# Altium PCB PCB1.PcbDoc
Units mm, origin at the board's own origin, x right, y up, seen from the top; angles counter-clockwise.
Board outline 152.4 x 101.6 mm, 2 copper layers (Top Layer, Bottom Layer); 58 components, 44 nets, 218 pads, 0 vias.
Unrouted connection lines stored in the file: 33.
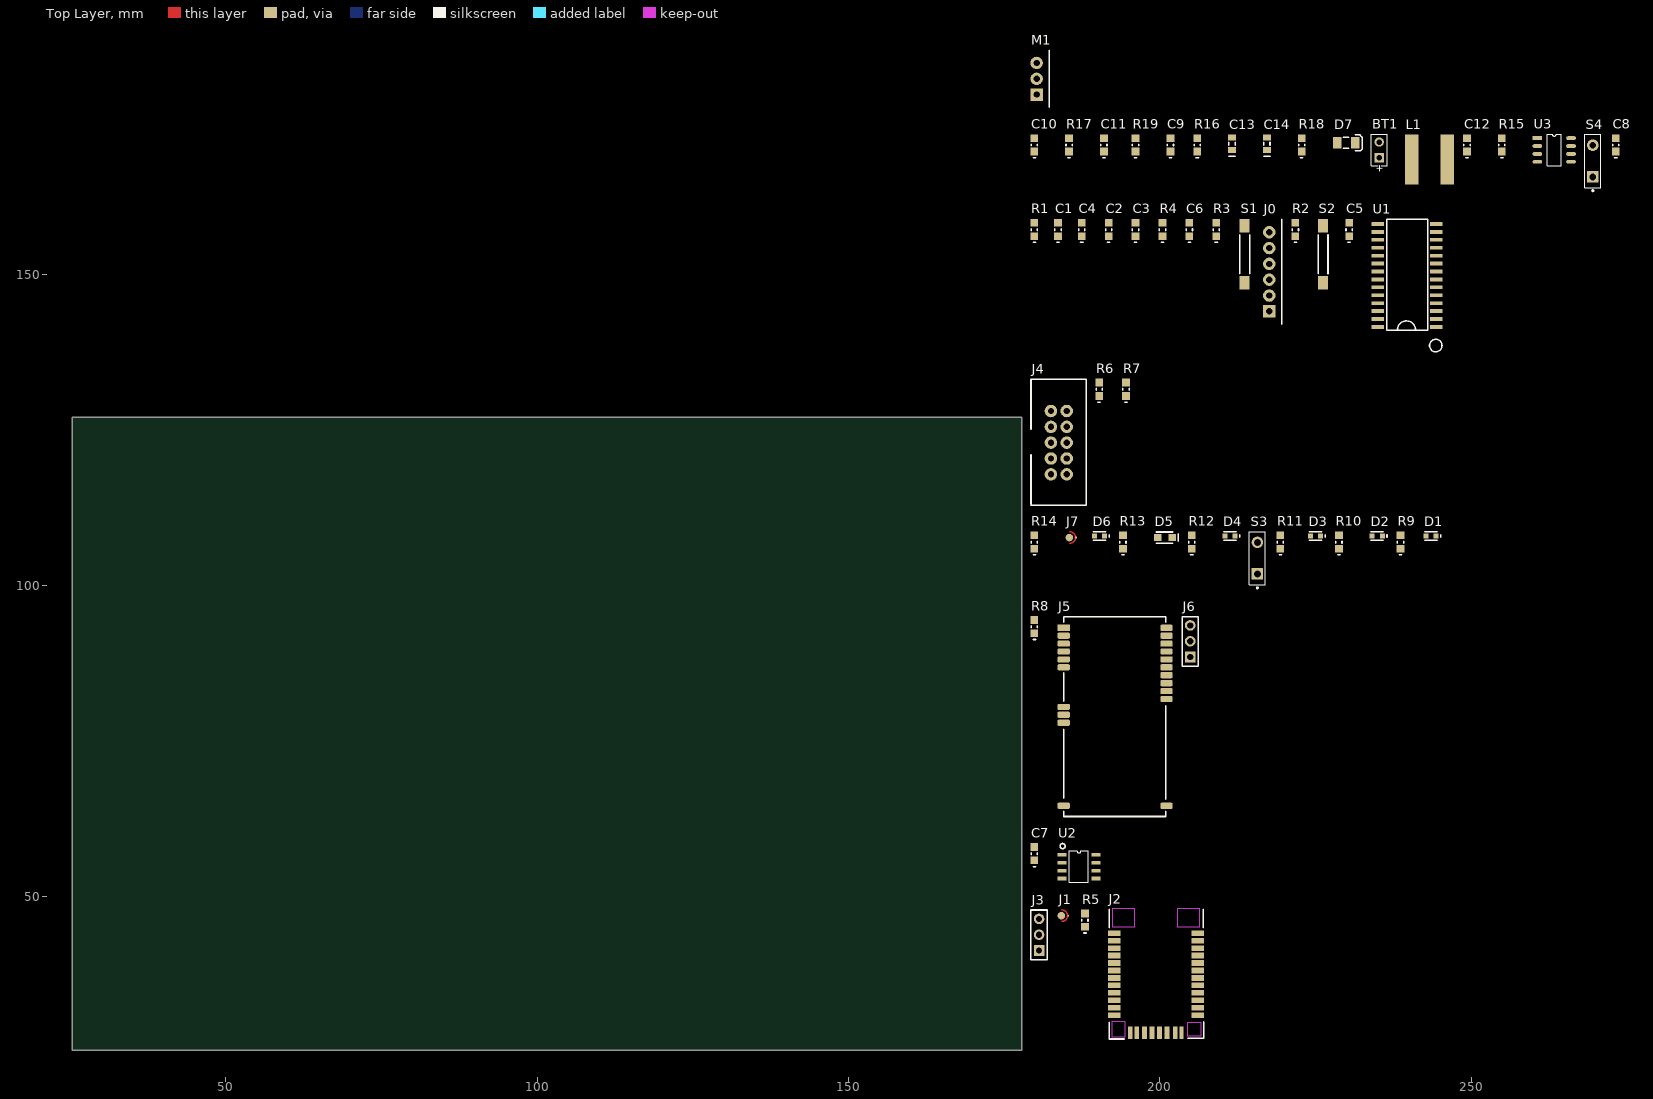
[diagram p0: Top Layer view]
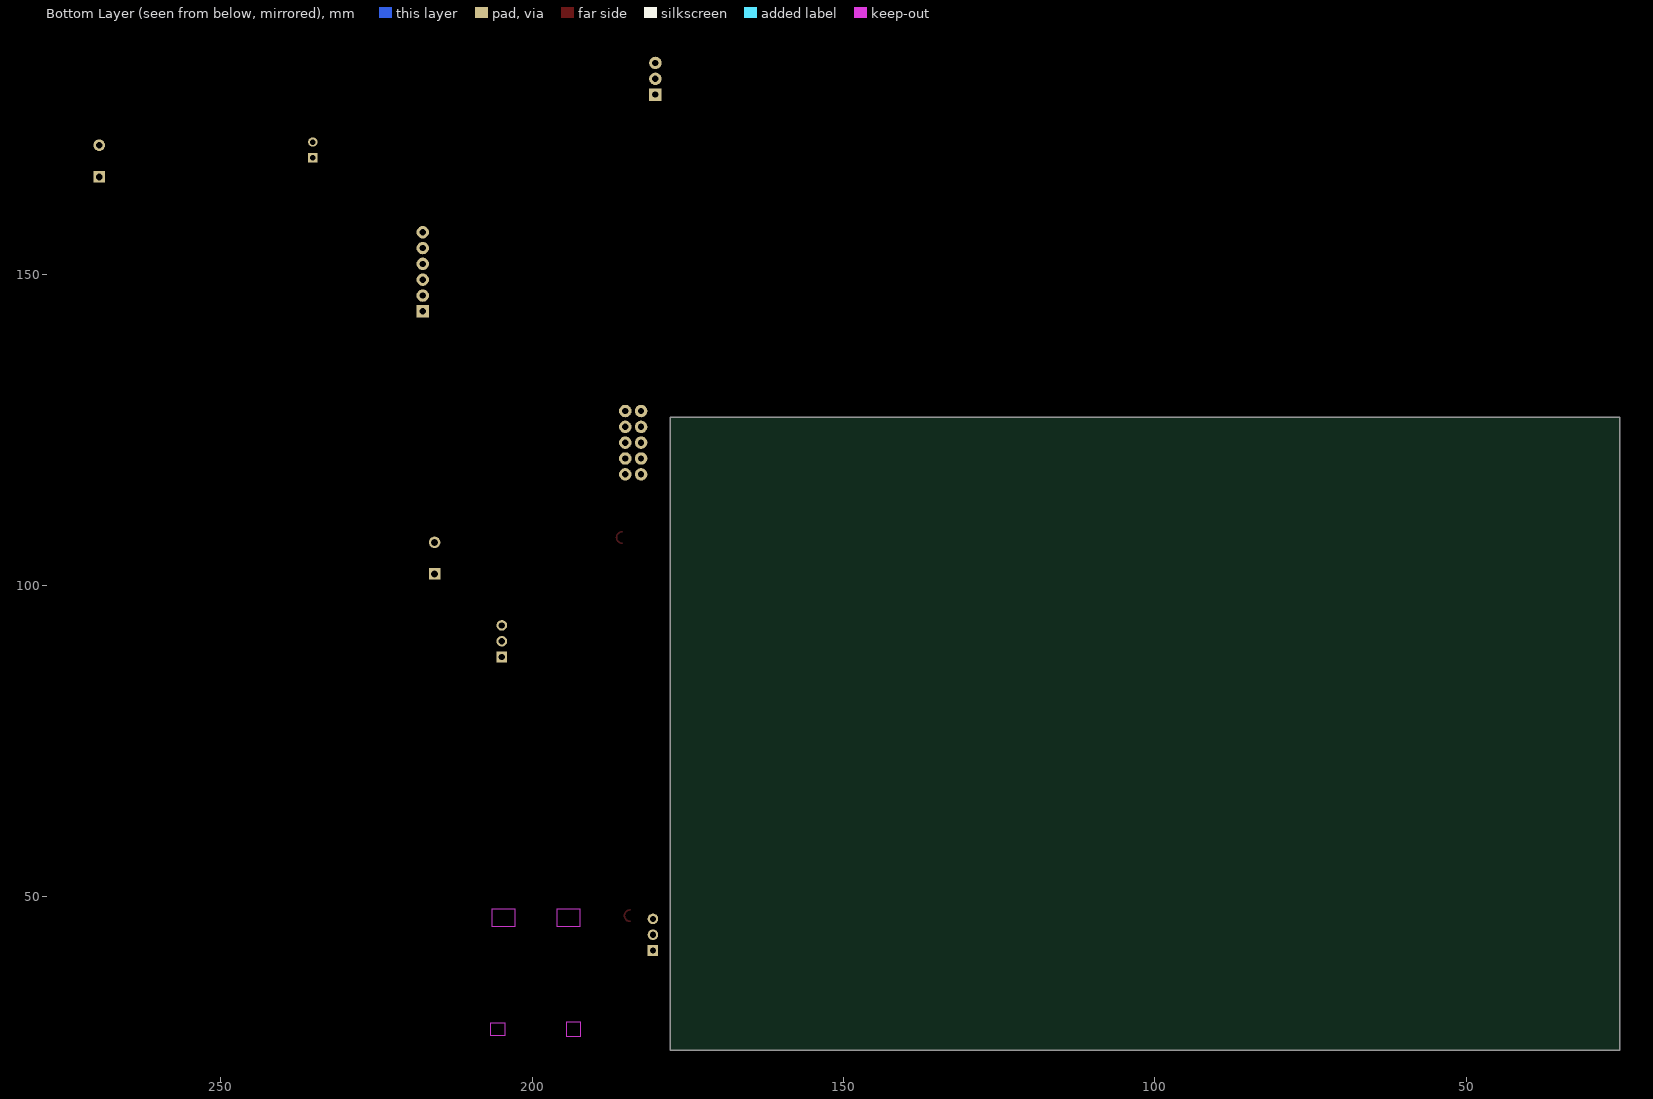
[diagram p1: Bottom Layer view, seen from below]

## Layer stack, top to bottom
Top Layer: signal copper 0.0356
Dielectric: dielectric 0.32, FR-4, Dk 4.8
Bottom Layer: signal copper 0.0356

## Board outline
25.4,25.4 177.8,25.4 177.8,127 25.4,127

## Design rules (kind name [scope] priority, off if disabled: settings)
Clearance [All] p1: gap=0.1
PolygonConnect [All] p1: connectstyle=Relief reliefconductorwidth=0.254 reliefentries=4 polygonreliefangle="90 Angle" airgapwidth=0.254
RoutingVias [All] p1: holewidth=0.711 width=1.27 viastyle="Through Hole" minholewidth=0.711 minwidth=1.27 maxholewidth=0.711 maxwidth=1.27
SolderMaskExpansion [All] p1: expansion=0.102
Width [All] p1: maxlimit=2 minlimit=0.1 preferedwidth=0.254
28 further rules are at their usual default settings.

## Components (designator, comment, footprint, x,y, rotation, side; value= is the part's Value field where it differs from the comment)
BT1 "5-10V" BAT-2 235.204,169.926 r90 top
C1 "0.1uF" own_0603 183.642,156.083 r90 top
C2 "0.1µF" own_0603 191.77,156.083 r90 top
C3 "0.1µF" own_0603 196.088,156.083 r90 top
C4 "0.1µF" own_0603 187.452,156.083 r90 top
C5 "10µF" own_0603 230.378,156.083 r90 top
C6 "0.1uF" own_0603 204.724,156.083 r90 top
C7 "100nF" own_0603 179.832,55.88 r90 top
C8 "22uF" own_0603 273.177,169.672 r90 top
C9 "8.2nF" own_0603 201.676,169.672 r90 top
C10 "1.2nF" own_0603 179.832,169.672 r90 top
C11 "25pF" own_0603 191.008,169.672 r90 top
C12 "0.1uF" own_0603 249.301,169.672 r90 top
C13 "47uF" Own_0805 211.582,169.926 r90 top
C14 "47uF" Own_0805 217.17,169.926 r90 top
D1 "LED3" "1608 led" 242.697,107.95 r0 top
D2 "LED3" "1608 led" 234.061,107.95 r0 top
D3 "LED3" "1608 led" 224.155,107.95 r0 top
D4 "LED0" "1608 led" 210.439,107.95 r0 top
D5 "LED0" "20125 led" 199.644,107.696 r0 top
D6 "LED0" "1608 led" 189.484,107.95 r0 top
D7 "SS24FL" ShotkyCMS 228.473,171.069 r0 top
J0 "Program / Debug" "C-Grid III X6" 217.551,144.018 r90 top
J1 "jumper" jumper 184.277,46.99 r0 top
J2 "RN42" RN42 192.659,44.196 r0 top
J3 "DEBUG1" DEBUG3 180.594,41.402 r90 top
J4 "MAG3110 Breakout" "UEXT_MALE x10" 182.499,128.016 r0 top
J5 "A2035-H" A2035-H 184.658,93.218 r0 top
J6 "DEBUG2" DEBUG3 204.851,88.519 r90 top
J7 "jumper" jumper 185.547,107.696 r0 top
L1 "10uH" "Inductor CMS" 240.411,168.402 r0 top
M1 "SG90" "C-Grid III x3" 180.213,178.816 r90 top
R1 "10K" own_0603 179.832,156.083 r90 top
R2 "10K" own_0603 221.742,156.083 r90 top
R3 "1K" own_0603 209.042,156.083 r90 top
R4 "10K" own_0603 200.406,156.083 r90 top
R5 "10K" own_0603 187.96,45.212 r90 top
R6 "2.4K" own_0603 190.246,130.429 r90 top
R7 "2.4K" own_0603 194.564,130.429 r90 top
R8 "10K" own_0603 179.832,92.329 r90 top
R9 "100" own_0603 238.633,105.918 r90 top
R10 "100" own_0603 228.727,105.918 r90 top
R11 "100" own_0603 219.329,105.918 r90 top
R12 "100" own_0603 205.105,105.918 r90 top
R13 "100" own_0603 194.056,105.918 r90 top
R14 "330" own_0603 179.832,105.918 r90 top
R15 "174K" own_0603 254.889,169.672 r90 top
R16 "133K" own_0603 205.994,169.672 r90 top
R17 "44.2K" own_0603 185.42,169.672 r90 top
R18 "10.2K" own_0603 222.758,169.672 r90 top
R19 "3.24K" own_0603 196.088,169.672 r90 top
S1 "SW-PB" "SWTCH 1" 213.614,148.59 r90 top
S2 "SW-PB" "SWTCH 1" 226.187,148.59 r90 top
S3 "SW-SPST" SPST-2 215.646,104.394 r90 top
S4 "SW-SPST" SPST-2 269.494,168.148 r90 top
U1 "PIC32MX250F128B" PIC32MX250F128/SO 243.586,141.224 r90 top
U2 "LE25U40CMD" LE25U40CMDTWG 184.277,56.769 r0 top
U3 "TPS54231D" R-PDSO-G8 260.604,171.831 r0 top

## Footprints (in the part's own frame and the unit in brackets; to place one, negate y for a bottom-side part, rotate by r counter-clockwise, add the part's x,y. Pads: shape width x height; smd on the part's side, far side on the other; paste and mask are expansions set on the pad)
"1608 led" [mm] "led fp"
  rect 0.8x0.8 smd: 1(0,0) 2(1.65,0)
  silkscreen extent -0.2,-0.7 2.4,0.7
"20125 led" [mm] "led fp"
  rect 1.25x1.1 smd: 1(0,0) 2(2.35,0)
  silkscreen extent -0.2,-0.9 3.3,0.9
A2035-H [mm]
  rect 2x1 smd: 1(-0.11,0)
  rrect50% 2x1 smd: 2(-0.11,-1.27) 3(-0.11,-2.54) 4(-0.11,-3.81) 5(-0.11,-5.08) 6(-0.11,-6.35) 7(-0.11,-12.7) 8(-0.11,-13.97) 9(-0.11,-15.24) 10(-0.11,-28.575) 11(16.4,-28.575) 12(16.4,-11.43) 13(16.4,-10.16) 14(16.4,-8.89) 15(16.4,-7.62) 16(16.4,-6.35) 17(16.4,-5.08) 18(16.4,-3.81) 19(16.4,-2.54) 20(16.4,-1.27) 21(16.4,0)
  silkscreen extent -0.1,-30.3 16.3,1.8
BAT-2 [mm] "Battery; 2 Leads"
  rect 1.5x1.5 hole 0.9: 1(-1.27,0)
  round 1.5 hole 0.9: 2(1.27,0)
  silkscreen extent -2.54,-1.27 2.54,1.27
"C-Grid III x3" [mm]
  rect 2x2 hole 1: 1(0,0)
  round 2 hole 1: 2(2.54,0) 3(5.08,0)
  silkscreen extent -2,-2 7.1,-2
"C-Grid III X6" [mm]
  rect 2x2 hole 1: 1(0,0)
  round 2 hole 1: 2(2.54,0) 3(5.08,0) 4(7.62,0) 5(10.16,0) 6(12.7,0)
  silkscreen extent -2.1,-2 14.8,-2
DEBUG3 [mm] "3 pin header footprint"
  rect 1.7x1.7 hole 1: 1(0,0)
  round 1.7 hole 1: 2(2.54,0) 3(5.08,0)
  silkscreen extent -1.5,-1.3 6.5,1.3
"Inductor CMS" [mm] "Power inductor footprint"
  rect 2.2x8 smd: 1(0,0) 2(5.7,0)
jumper [mm] "jumper"
  round 1.2 smd: 1(-0.1,0)
  rect 0.3x0.3 smd: 2(1,0)
  Top Layer lines w0.254: 0,-0.9 ccw(c-0.012,0.013) 0.001,0.926
LE25U40CMDTWG [mm]
  rect 1.5x0.6 smd: 1(0,0) 2(0,-1.27) 3(0,-2.54) 4(0,-3.81) 5(5.45,-3.81) 6(5.45,-2.54) 7(5.45,-1.27) 8(5.45,0)
  silkscreen extent -0.31,-4.44 4.2,1.81
own_0603 [mm] "0603_fp"
  rect 1.25x1.25 smd: 1(0,0) 2(2.15,0)
  silkscreen extent -1,-0.5 1.2,0.5
Own_0805 [mm] "0805 footprint"
  rect 1x1.25 smd: 1(0,0) 2(2,0)
  silkscreen extent -1,-0.5 1.2,0.5
PIC32MX250F128/SO [mm]
  rect 0.6x2 smd: 1(0.3,-0.8) 2(1.57,-0.8) 3(2.84,-0.8) 4(4.11,-0.8) 5(5.38,-0.8) 6(6.65,-0.8) 7(7.92,-0.8) 8(9.19,-0.8) 9(10.46,-0.8) 10(11.73,-0.8) 11(13,-0.8) 12(14.27,-0.8) 13(15.54,-0.8) 14(16.81,-0.8) 15(16.81,8.6) 16(15.54,8.6) 17(14.27,8.6) 18(13,8.6) 19(11.73,8.6) 20(10.46,8.6) 21(9.19,8.6) 22(7.92,8.6) 23(6.65,8.6) 24(5.38,8.6) 25(4.11,8.6) 26(2.84,8.6) 27(1.57,8.6) 28(0.3,8.6)
  silkscreen extent -3.7,-1.7 17.55,7.2
R-PDSO-G8 [mm] "TPS54231"
  rect 1.55x0.6 smd: 1(0,0)
  oval 1.55x0.6 smd: 2(0,-1.27) 3(0,-2.54) 4(0,-3.81) 5(5.4,-3.81) 6(5.4,-2.54) 7(5.4,-1.27) 8(5.4,0)
  silkscreen extent 1.61,-4.44 3.79,0.64
RN42 [mm]
  rect 2x0.9 smd: 1(0,0) 2(0,-1.2) 3(0,-2.4) 4(0,-3.6) 5(0,-4.8) 6(0,-6) 7(0,-7.2) 8(0,-8.4) 9(0,-9.6) 10(0,-10.8) 11(0,-12) 12(0,-13.2) 13(13.4,-13.2) 14(13.4,-12) 15(13.4,-10.8) 16(13.4,-9.6) 17(13.4,-8.4) 18(13.4,-7.2) 19(13.4,-6) 20(13.4,-4.8) 21(13.4,-3.6) 22(13.4,-2.4) 23(13.4,-1.2) 24(13.4,0)
  rect 0.7x2 smd: 28(9.8,-16) 29(3.6,-16) 30(10.8,-16) 35(2.6,-16)
  rect 0.8x2 smd: 31(8.5,-16) 32(7.3,-16) 33(6.1,-16) 34(4.9,-16)
  Keep-Out Layer region: -0.4,-16.6 1.8,-16.6 1.8,-14.2 -0.4,-14.2
  Keep-Out Layer region: 11.7,-16.5 14,-16.5 14,-14.4 11.7,-14.4
  Keep-Out Layer region: -0.3,1 3.3,1 3.3,3.9 -0.3,3.9
  Keep-Out Layer region: 10.1,1 13.7,1 13.7,3.9 10.1,3.9
  silkscreen extent -0.8,-17 14.4,3.8
ShotkyCMS [mm] "ss24fl footprint"
  rect 1.34x1.8 smd: 1(0,0) 2(2.86,0)
  silkscreen extent 1,-1.3 4,1.3
SPST-2 [mm] "Switch; 2 Leads"
  rect 1.85x1.85 hole 1.1: 1(-2.54,0)
  round 1.85 hole 1.1: 2(2.54,0)
  silkscreen extent -4.89,-1.27 4.28,1.27
"SWTCH 1" [mm] "Switch cms footprint"
  rect 2.18x1.6 smd: 1(0,0) 2(9.2,0)
  silkscreen extent 1.5,-0.8 7.7,0.8
"UEXT_MALE x10" [mm]
  round 2 hole 1: 1(0,0) 2(2.54,0) 3(0,-2.54) 4(2.54,-2.54) 5(0,-5.08) 6(2.54,-5.08) 7(0,-7.62) 8(2.54,-7.62) 9(0,-10.16) 10(2.54,-10.16)
  silkscreen extent -3.2,-15.1 5.7,5.1

## Part data
BT1: library part Battery, "4xAA"
C1 C2 C3 C4 C5 C6 C7 C8 C9 C10 C11 C12 C13 C14: library part Cap, "Capacitor"
D1 D2 D3: "Typical BLUE SiC LED"
D4 D5 D6: "Typical INFRARED GaAs LED"
D7: library part "Diode 10TQ035", "Schottky Rectifier"
J0: library part ICSP
J1 J7: "Jumper"
J2: "Bluetooth Module"
J3 J6: library part TTL_Debug_3, "Debug interface"
J4: library part MOD-MAG3110
J5: "GPS Module"
L1: library part Inductor, "Inductor"
M1: "Servo motor"
R1 R2 R3 R4 R5 R6 R7 R8 R9 R10 R11 R12 R13 R14 R15 R16 R17 R18 R19: library part Res1, "Resistor"
S1 S2: "Switch"
S3 S4: "Single-Pole, Single-Throw Switch"
U1: "Microcontrolleur"
U2: "Flash memory"
U3: "Buck SD 3.3V"

## Nets (pads, with @x,y where several pads share a name; then routed paths per layer and width w, separated by ;. In a path a pad name is that pad's centre, name@x,y a point inside that pad or via, vN(x,y) a via of type N, cw(c..) or ccw(c..) an arc to the next point about the centre after c; other vN are vias at no path point)
GND: BT1.2 C1.1 C2.1 C3.1 C4.1 C5.1 C6.1 C7.1 C8.2 C9.1 C10.1 C11.1 C13.1 C14.1 D4.2 D5.2 D7.2 J0.3 J1.1 J2.1 J2.12 J2.28 J2.29
"MAIN BUTTON": C6.2
MCLR: J0.1
NetBT1_1: BT1.1
NetC4_2: C4.2
NetC5_2: C5.2
NetC8_1: C8.1
NetC9_2: C9.2
NetC10_2: C10.2
NetC11_2: C11.2
NetC12_1: C12.1 D7.1
NetC12_2: C12.2
NetD1_2: D1.2
NetD2_2: D2.2
NetD3_2: D3.2
NetD4_1: D4.1
NetD5_1: D5.1
NetD6_1: D6.1
NetD6_2: D6.2
NetJ2_13: J2.13
NetJ2_14: J2.14
NetJ2_21: J2.21
NetJ4_5: 
NetJ4_6: 
NetJ5_1: 
NetJ5_5: 
NetJ5_7: 
NetJ5_18: 
NetJ5_20: 
NetJ5_21: 
NetM1_3: 
NetR9_2: 
NetR12_1: 
NetR13_1: 
NetR15_2: 
NetR18_2: 
NetU1_22: 
NetU1_24: 
NetU1_25: 
NetU1_26: 
PGEC: J0.5
PGED: J0.4
"SECONDARY BUT": C1.2
V3P3: C2.2 C3.2 C7.2 C13.2 C14.2 D1.1 D2.1 D3.1 J0.2 J2.4 J2.11
pads on no net: J0.6 J1.2 J2.2 J2.3 J2.5 J2.6 J2.7 J2.8 J2.9 J2.10 J2.15 J2.16 J2.17 J2.18 J2.19 J2.20 J2.22 J2.23 J2.24 J2.30 J2.31 J2.32 J2.33 J2.34 J2.35 J3.1 J3.2 J3.3 J4.1 J4.2 J4.3 J4.4 J4.5 J4.6 J4.7 J4.8 J4.9 J4.10 J5.1 J5.2 J5.3 J5.4 J5.5 J5.6 J5.7 J5.8 J5.9 J5.10 J5.11 J5.12 J5.13 J5.14 J5.15 J5.16 J5.17 J5.18 J5.19 J5.20 J5.21 J6.1 J6.2 J6.3 J7.1 J7.2 L1.1 L1.2 M1.1 M1.2 M1.3 R1.1 R1.2 R2.1 R2.2 R3.1 R3.2 R4.1 R4.2 R5.1 R5.2 R6.1 R6.2 R7.1 R7.2 R8.1 R8.2 R9.1 R9.2 R10.1 R10.2 R11.1 R11.2 R12.1 R12.2 R13.1 R13.2 R14.1 R14.2 R15.1 R15.2 R16.1 R16.2 R17.1 R17.2 R18.1 R18.2 R19.1 R19.2 S1.1 S1.2 S2.1 S2.2 S3.1 S3.2 S4.1 S4.2 U1.1 U1.2 U1.3 U1.4 U1.5 U1.6 U1.7 U1.8 U1.9 U1.10 U1.11 U1.12 U1.13 U1.14 U1.15 U1.16 U1.17 U1.18 U1.19 U1.20 U1.21 U1.22 U1.23 U1.24 U1.25 U1.26 U1.27 U1.28 U2.1 U2.2 U2.3 U2.4 U2.5 U2.6 U2.7 U2.8 U3.1 U3.2 U3.3 U3.4 U3.5 U3.6 U3.7 U3.8

## Text inside footprints (layer, text, board x,y; h text height)
BT1: Top Overlay "+" at 235.781,166.256 h1.15 r90